# Altium PCB Current-Probe.PcbDoc
Units mm, origin at the board's own origin, x right, y up, seen from the top; angles counter-clockwise.
Board outline 25 x 45 mm, 4 copper layers (Top Layer, MidLayer1, MidLayer2, Bottom Layer), stack 1.57 mm thick; 62 components, 32 nets, 189 pads, 50 vias.
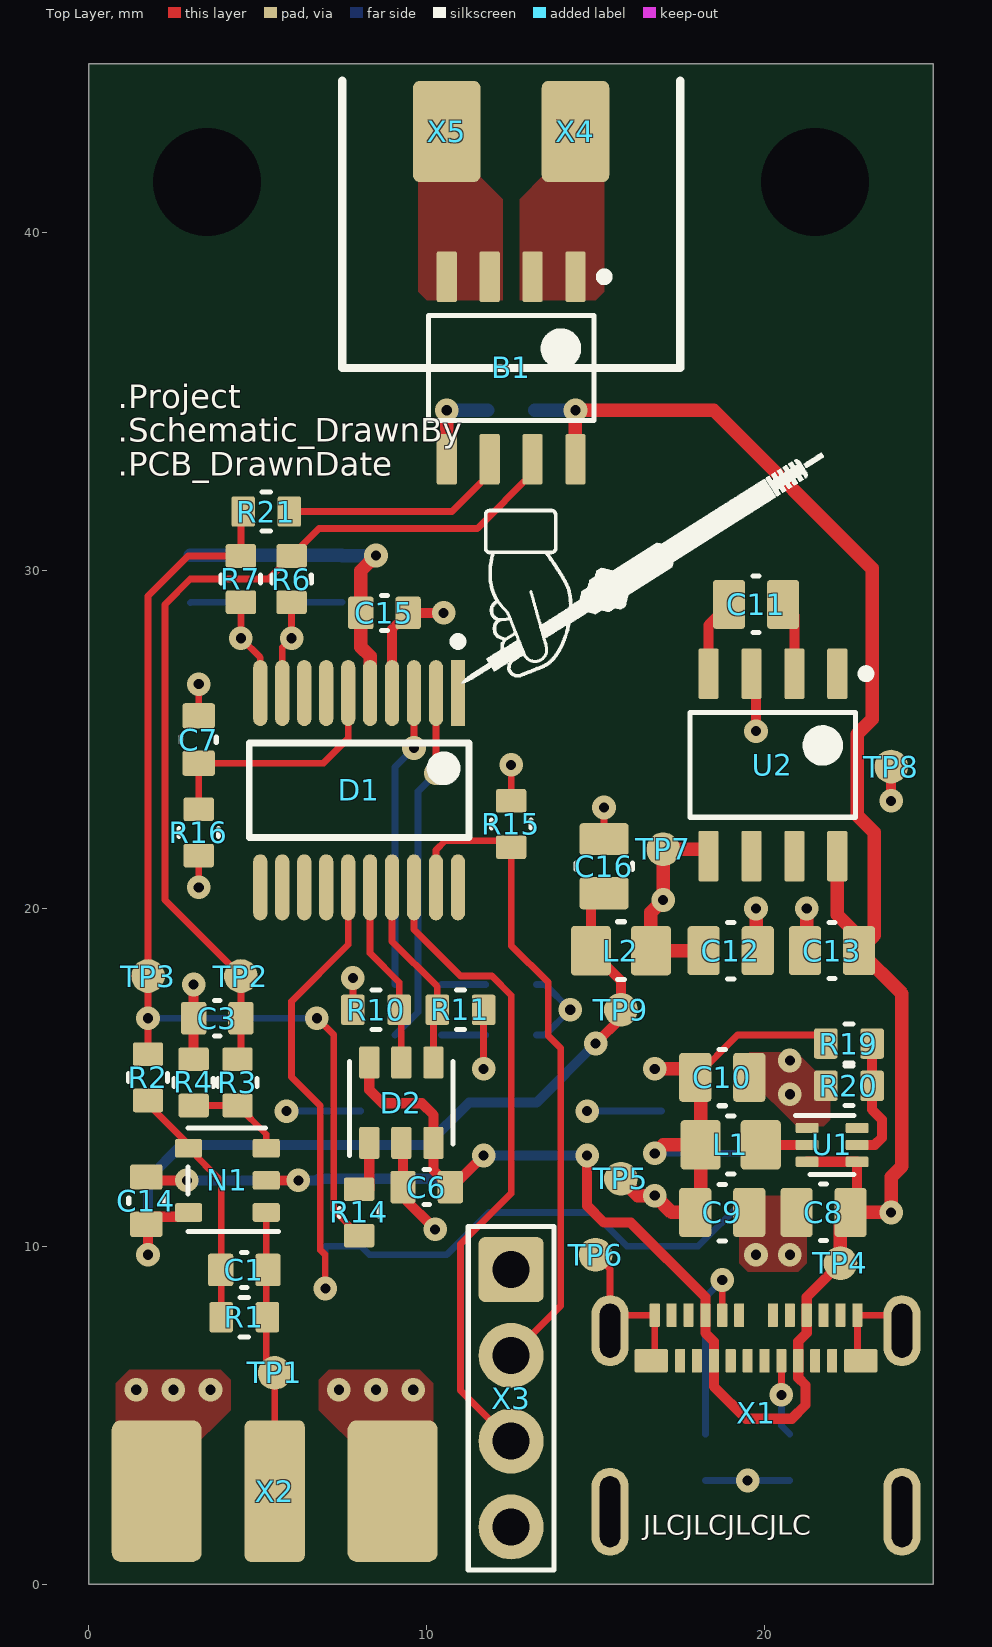
[diagram p0: Top Layer view]
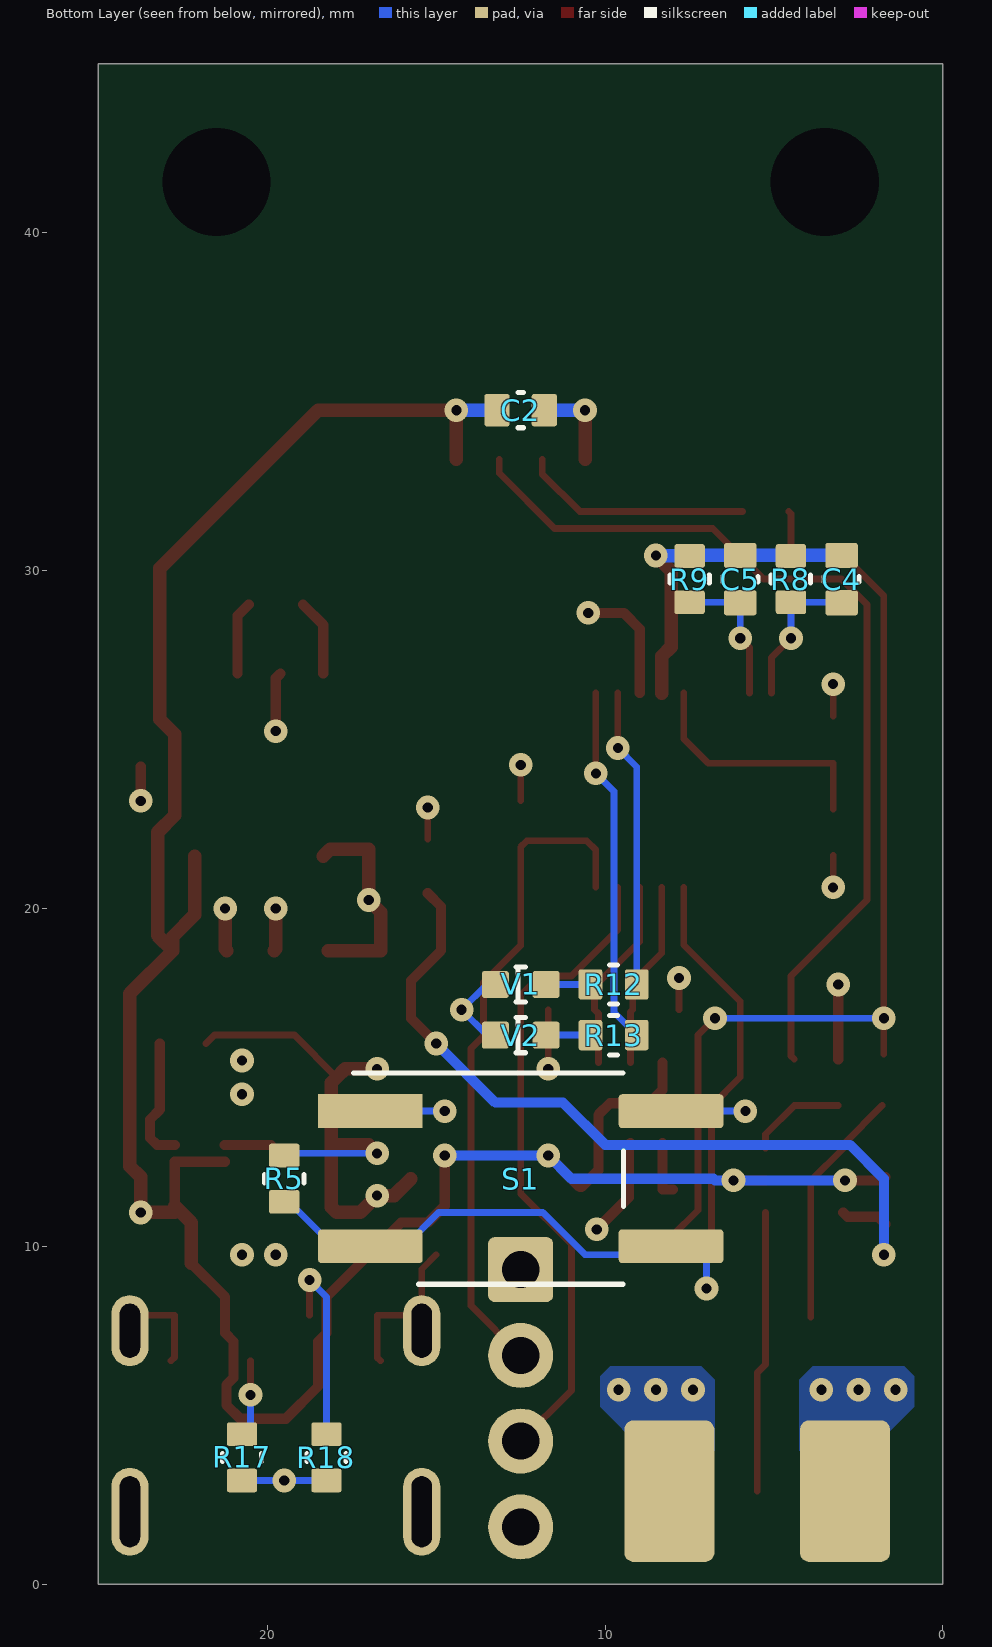
[diagram p1: Bottom Layer view, seen from below]
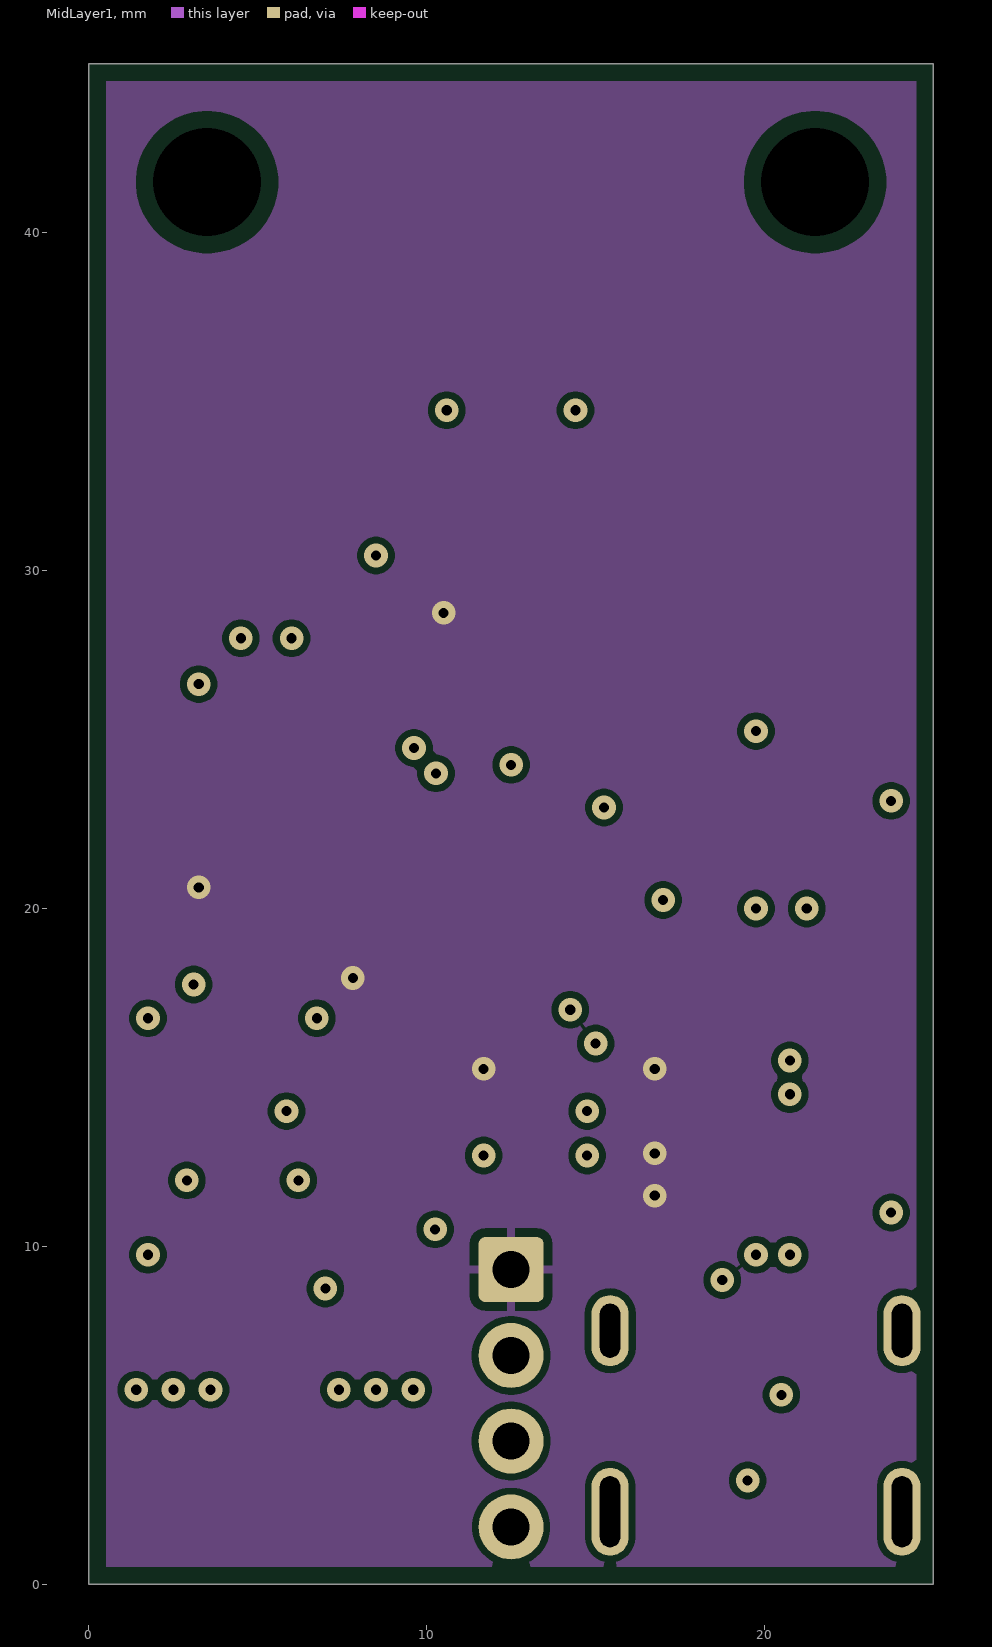
[diagram p2: MidLayer1]
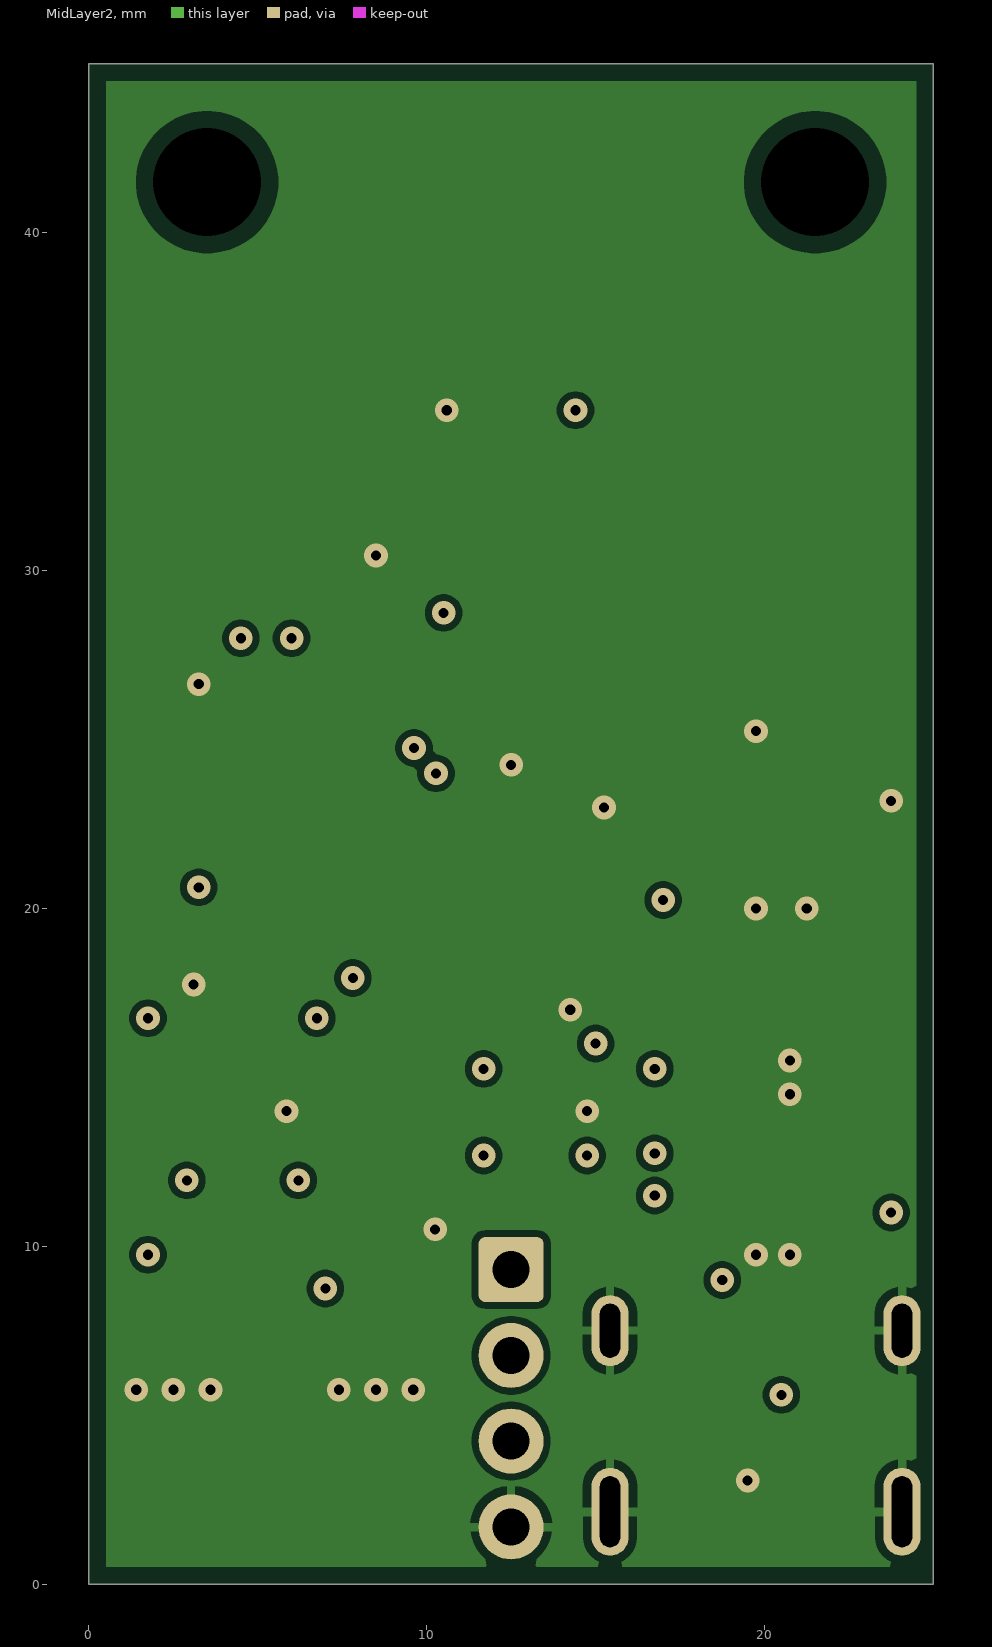
[diagram p3: MidLayer2]
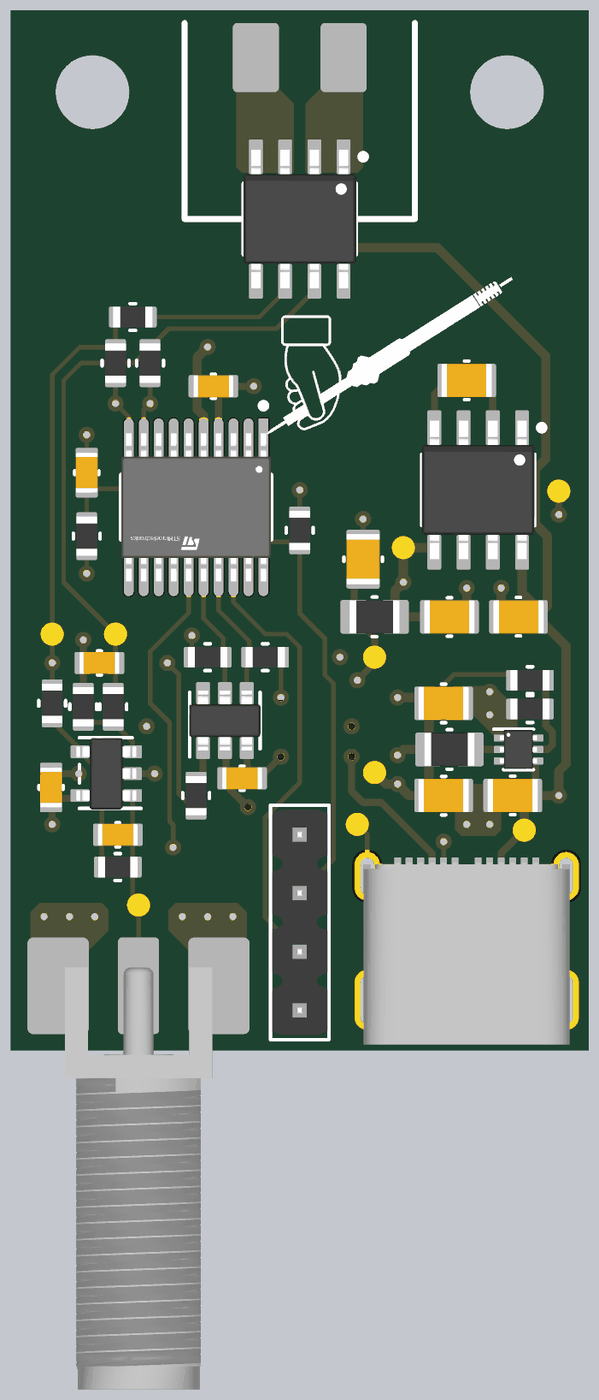
[diagram p4: 3D render of the assembled board from above, using the file's embedded part models]
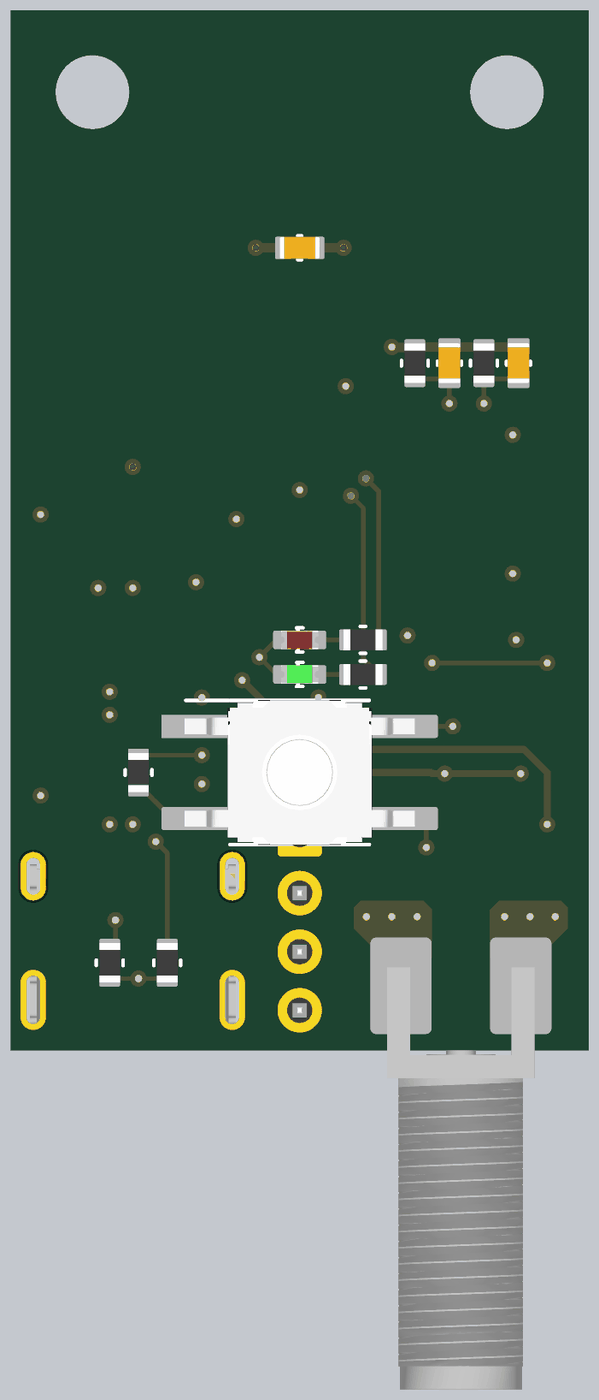
[diagram p5: 3D render of the assembled board from below, using the file's embedded part models]

## Layer stack, top to bottom
Top Solder: solder mask 0.01, Solder Resist, Dk 3.5
Top Layer: signal copper 0.035
Dielectric1: prepreg 0.18, FR-4 (7628), Dk 4.2
Dielectric 2: prepreg 0.18, FR-4 (7628), Dk 4.2
MidLayer1: signal copper 0.035
Core: core 0.71, Dk 4.2
MidLayer2: signal copper 0.035
Dielectric 3: prepreg 0.18, FR-4 (7628), Dk 4.2
Dielectric 4: prepreg 0.18, FR-4 (7628), Dk 4.2
Bottom Layer: signal copper 0.035
Bottom Solder: solder mask 0.01, Solder Resist, Dk 3.5

## Board outline
0,0 0,45 25,45 25,0

## Design rules (kind name [scope] priority, off if disabled: settings)
AssemblyTestPointUsage [IsTestpoint] p1:
AssemblyTestpoint [IsTestpoint] p1 off: testpointundercomponent=TRUE minsize=0.8 maxsize=1.6 preferedsize=0.85 minholesize=0 maxholesize=0 preferedholesize=0 testpointgrid=0.025 usegrid=FALSE gridtolerance=0 allowsidetop=TRUE allowsidebottom=TRUE minspacing=2.54
BoardOutlineClearance [All and not OnLayer('Top Overlay')] p1: gap=0.5 ignorepadtopadclearanceinfootprint=FALSE except(0: Arc-SplitContinuation Track-SplitContinuation SMDPad-SplitContinuation Fill-SplitContinuation Poly-SplitContinuation Region-SplitContinuation Text-SplitContinuation; 1.5: THPad-SplitContinuation Via-SplitContinuation)
Clearance Clearance_NetClasses [InNetClass('PrimarySide') vs InNetClass('SecondarySide')] p1: gap=1 ignorepadtopadclearanceinfootprint=FALSE except(0: Arc-Hole Track-Hole SMDPad-Hole THPad-Hole Via-Hole Fill-Hole Poly-Hole Region-Hole Text-Hole)
Clearance Clearance_Pri-PE [InNetClass('PrimarySide') vs InNet('EARTH') or InNet('EARTH_G2') or InNet('EARTH_USB') or InNet('NetC3_2')] p2: gap=1 ignorepadtopadclearanceinfootprint=FALSE except(0: Arc-Hole Track-Hole SMDPad-Hole THPad-Hole Via-Hole Fill-Hole Poly-Hole Region-Hole Text-Hole)
Clearance Clearance_Sec-PE [InNetClass('SecondarySide') vs InNet('EARTH') or InNet('EARTH_G2') or InNet('EARTH_USB') or InNet('NetC3_2')] p3: gap=0.5 ignorepadtopadclearanceinfootprint=FALSE except(0: Arc-Hole Track-Hole SMDPad-Hole THPad-Hole Via-Hole Fill-Hole Poly-Hole Region-Hole Text-Hole)
Clearance Clearance_KeepOut [OnLayer('Keep-Out Layer')] p4: gap=0.5 ignorepadtopadclearanceinfootprint=FALSE except(0: Arc-Hole Track-Hole SMDPad-Hole THPad-Hole Via-Hole Fill-Hole Poly-Hole Region-Hole Text-Hole)
Clearance Clearance2Holes [not OnTopLayer AND NOT OnBottomLayer vs (ObjectKind = 'Pad') And (Layer = 'MultiLayer') And (PadIsPlated = 'False')] p5: gap=0.5 ignorepadtopadclearanceinfootprint=FALSE except(0: Arc-Hole Track-Hole SMDPad-Hole THPad-Hole Via-Hole Fill-Hole Poly-Hole Region-Hole Text-Hole)
Clearance Clearance_via2via [IsVia vs IsVia] p6: gap=0.15 ignorepadtopadclearanceinfootprint=FALSE
Clearance [All] p7: gap=0.2 ignorepadtopadclearanceinfootprint=FALSE except(0: Arc-Hole Track-Hole SMDPad-Hole THPad-Hole Via-Hole Fill-Hole Poly-Hole Region-Hole Text-Hole)
ComponentClearance [IsComponent] p1 off: gap=0.254 collisioncheckmode=3 verticalgap=0.254 showdistances=TRUE donotcheckwithout3dbody=TRUE
FabricationTestPointUsage [IsTestpoint] p1: valid=0 allowmultiple=FALSE
FabricationTestpoint [IsTestpoint] p1 off: side=3 testpointundercomponent=TRUE minsize=0.8 maxsize=1.6 preferedsize=0.85 minholesize=0 maxholesize=0 preferedholesize=0 testpointgrid=0.025 allowsidetop=TRUE allowsidebottom=TRUE usegrid=FALSE gridtolerance=0 minspacing=2.54 boardedgeclearance=1.9
HoleSize [All] p1: absolutevalues=TRUE maxlimit=6.4 minlimit=0.2 maxpercent=80.000 minpercent=20.000
MinimumAnnularRing MinimumAnnularRingVia [IsVia] p1: minimumring=0.15
MinimumAnnularRing MinimumAnnularRingDefault [All] p2: minimumring=0.15
MinimumSolderMaskSliver MinimumSolderMaskSliver_Symbols [IsComponent] p1: minsoldermaskwidth=0
MinimumSolderMaskSliver [All] p2: minsoldermaskwidth=0.1
PlaneClearance PlaneClearance_PE [InNet('EARTH_USB')  or InNet('EARTH_G2') or InNet('NetC3_2') or InNet('EARTH')] p1: clearance=1
PlaneClearance PlaneClearance_Holes-via [(IsVia)] p2: clearance=0.35
PlaneClearance PlaneClearance_Holes-Special [(InComponentClass('SpecialConnector'))] p3: clearance=0.35
PlaneClearance [All] p4: clearance=0.5
PlaneConnect "PlaneConnect_Special Con" [OnBottomLayer or OnTopLayer] p1: planeconnectstyle=Direct reliefexpansion=0.508 reliefentries=4 reliefconductorwidth=0.254 reliefairgap=0.254
PlaneConnect PlaneConnect_Components [(InComponentClass('All Components'))] p2: planeconnectstyle=Relief reliefexpansion=0.35 reliefentries=4 reliefconductorwidth=0.25 reliefairgap=0.25
PlaneConnect [All] p3: planeconnectstyle=Direct reliefexpansion=0.508 reliefentries=4 reliefconductorwidth=0.254 reliefairgap=0.254
PolygonConnect PolygonConnect_Components [(InComponentClass('All Components') and not OnOutside)] p1: connectstyle=Relief reliefconductorwidth=0.254 reliefentries=4 polygonreliefangle="90 Angle" airgapwidth=0.254
PolygonConnect [All] p2: connectstyle=Direct reliefconductorwidth=0.254 reliefentries=4 polygonreliefangle="90 Angle" airgapwidth=0.254
RoutingVias Micro-Vias [((ObjectKind = 'Via') AND (StartLayer = 'Top Layer') AND (StopLayer = 'InternalPlane1')) OR ((ObjectKind = 'Via') AND (StartLayer = 'Bottom Layer') AND (StopLayer = 'InternalPlane2'))] p1: holewidth=0.15 width=0.35 viastyle="Through Hole" minholewidth=0.15 minwidth=0.35 maxholewidth=0.15 maxwidth=0.35
RoutingVias [All] p2: holewidth=0.2 width=0.55 viastyle="Through Hole" minholewidth=0.2 minwidth=0.55 maxholewidth=0.3 maxwidth=0.7
SilkToSilkClearance [All] p1: silktosilkclearance=0.2
SilkToSolderMaskClearance SilkToPadClearance [IsPad] p1: minsilkscreentomaskgap=0.2 clearancetoexposedcopper=TRUE
SolderMaskExpansion SolderMaskExpansionVias [IsVia] p1: expansion=0.15 istentingtop=FALSE soldermaskfromhole=TRUE
SolderMaskExpansion SolderMaskExpansionHoles [(ObjectKind = 'Pad') And (PadIsPlated = 'False') And (AsMM(PadXSize_AllLayers) = 0) And (AsMM(PadYSize_AllLayers) = 0)] p2: expansion=0.05 istentingtop=FALSE soldermaskfromhole=TRUE
SolderMaskExpansion SolderMaskExpansionSTD [IsPad  Or IsRegion] p3: expansion=0.05 istentingtop=FALSE
ViasUnderSMD ViasUnderSMD_TP [HasFootprint('TP_1.0mm')] p1: allowed=TRUE
ViasUnderSMD [All] p2: allowed=FALSE
Width [All] p1: maxlimit=2 minlimit=0.15 preferedwidth=0.2 minimp=50.000000 maximp=50.000000 favimp=50.000000
19 further rules are at their usual default settings.

## Classes and differential pairs
component class Surface_Assy: L2
component class Testpoint: TP1 TP2 TP3 TP4 TP5 TP6 TP7 TP8 TP9 X4 X5
component class Through-Hole_Assy: X1 X2 X3
component class Surface_Assy: B1 C1 C2 C3 C4 C5 C6 C7 C8 C9 C10 C11 C12 C13 C14 C15 C16 D1 D2 L1 N1 R1 R2 R3 R4 R5 R6 R7 R8 R9 R10 R11 R12 R13 R14 R15 R16 R17 R18 R19 R20 R21 S1 U1 U2 V1 V2

## Components (designator, comment, footprint, x,y, rotation, side; value= is the part's Value field where it differs from the comment)
B1 "CC6920SO-40A" SOIC8_N_RF 12.5,36 r270 top
C1 "Cap 10p 0603" C-0603_1608_095_L_RF 4.6,9.3 r0 top value=10pF
C2 "Cap 100n 0603" C-0603_1608_095_L_RF 12.5,34.75 r0 bottom value=100nF
C3 "Cap 100p 0603" C-0603_1608_095_L_RF 3.8,16.75 r0 top value=100pF
C4 "Cap 100p 0603" C-0603_1608_095_L_RF 3,29.75 r270 bottom value=100pF
C5 "Cap 100p 0603" C-0603_1608_095_L_RF 6,29.75 r270 bottom value=100pF
C6 "Cap 100n 0603" C-0603_1608_095_L_RF 10,11.75 r0 top value=100nF
C7 "Cap 100n 0603" C-0603_1608_095_L_RF 3.25,25 r270 top value=100nF
C8 "Cap 10u 0805" C-0805_2012_155_L_RF 21.75,11 r0 top value=10µF
C9 "Cap 10u 0805" C-0805_2012_155_L_RF 18.75,11 r180 top value=10µF
C10 "Cap 10u 0805" C-0805_2012_155_L_RF 18.75,15 r180 top value=10µF
C11 "Cap 10u 0805" C-0805_2012_155_L_RF 19.75,29 r0 top value=10µF
C12 "Cap 10u 0805" C-0805_2012_155_L_RF 19,18.75 r180 top value=10µF
C13 "Cap 10u 0805" C-0805_2012_155_L_RF 22,18.75 r0 top value=10µF
C14 "Cap 100n 0603" C-0603_1608_095_L_RF 1.7,11.35 r90 top value=100nF
C15 "Cap 100n 0603" C-0603_1608_095_L_RF 8.75,28.75 r0 top value=100nF
C16 "Cap 10u 0805" C-0805_2012_155_L_RF 15.25,21.25 r270 top value=10µF
D1 "STM32G030F6P6" TSSOP20_N_RF 8,23.5 r270 top
D2 "MCP4726A0T" SOT23-6_N_RF 9.25,14.25 r0 top
L1 "1uH" L_0805_N_RF 19,13 r180 top
L2 "600R" L_0805_N_RF 15.75,18.75 r180 top
N1 "LMC7101AIM5X" SOT23-5_L_RF 4.1,11.95 r90 top value=LM78L12ACM
R1 "Res 1k 0603" R-0603_1608_050_L_RF 4.6,7.9 r0 top value=1k
R2 "Res 1k 0603" R-0603_1608_050_L_RF 1.75,15 r270 top value=1k
R3 "Res 1k 0603" R-0603_1608_050_L_RF 4.4,14.85 r270 top value=1k
R4 "Res 1k 0603" R-0603_1608_050_L_RF 3.1,14.85 r90 top value=1k
R5 "Res 1k 0603" R-0603_1608_050_L_RF 19.5,12 r90 bottom value=1k
R6 "Res 10k 0603" R-0603_1608_050_L_RF 6,29.75 r270 top value=10k
R7 "Res 10k 0603" R-0603_1608_050_L_RF 4.5,29.75 r270 top value=10k
R8 "Res 10k 0603" R-0603_1608_050_L_RF 4.5,29.75 r270 bottom value=10k
R9 "Res 10k 0603" R-0603_1608_050_L_RF 7.5,29.75 r270 bottom value=10k
R10 "Res 1k 0603" R-0603_1608_050_L_RF 8.5,17 r180 top value=1k
R11 "Res 1k 0603" R-0603_1608_050_L_RF 11,17 r0 top value=1k
R12 "Res 1k 0603" R-0603_1608_050_L_RF 9.75,17.75 r180 bottom value=1k
R13 "Res 1k 0603" R-0603_1608_050_L_RF 9.75,16.25 r180 bottom value=1k
R14 "Res 1k 0603" R-0603_1608_050_L_RF 8,11 r90 top value=1k
R15 "Res 1k 0603" R-0603_1608_050_L_RF 12.5,22.5 r270 top value=1k
R16 "Res 10k 0603" R-0603_1608_050_L_RF 3.25,22.25 r270 top value=10k
R17 "Res 5k1 0603" R-0603_1608_050_L_RF 20.75,3.75 r90 bottom value=5.1k
R18 "Res 5k1 0603" R-0603_1608_050_L_RF 18.25,3.75 r90 bottom value=5.1k
R19 "Res 68k 0603" R-0603_1608_050_L_RF 22.5,16 r180 top value=68k
R20 "Res 15k 0603" R-0603_1608_050_L_RF 22.5,14.75 r0 top value=15k
R21 "Res 0R 0603" R-0603_1608_050_L_RF 5.25,31.75 r180 top value=0R
S1 "KSC241GLFS" S-0062x0062_R_P0890_C&K-KSC-241G-LFS 12.5,12 r270 bottom
TP1 "TestPoint 1.0mm" TP_1.0mm 5.5,6.25 r90 top value=TP
TP2 "TestPoint 1.0mm" TP_1.0mm 4.5,18 r90 top value=TP
TP3 "TestPoint 1.0mm" TP_1.0mm 1.75,18 r270 top value=TP
TP4 "TestPoint 1.0mm" TP_1.0mm 22.25,9.5 r0 top value=TP
TP5 "TestPoint 1.0mm" TP_1.0mm 15.75,12 r0 top value=TP
TP6 "TestPoint 1.0mm" TP_1.0mm 15,9.75 r0 top value=TP
TP7 "TestPoint 1.0mm" TP_1.0mm 17,21.75 r180 top value=TP
TP8 "TestPoint 1.0mm" TP_1.0mm 23.75,24.2 r180 top value=TP
TP9 "TestPoint 1.0mm" TP_1.0mm 15.75,17 r0 top value=TP
U1 "TPS62A01A" SOT-563_N_RF 22,13 r0 top
U2 "TC7660E" SOIC8_N_RF 20.25,24.25 r270 top
V1 "LED SMD 0603 Red" LED-0603_1608_Red_L_RF 12.5,17.75 r0 bottom value=red
V2 "LED SMD 0603 Green" LED-0603_1608_Green_L_RF 12.5,16.25 r0 bottom value=green
X1 "105450-0101" 105450-0101 19.75,7.5 r0 top
X2 "73251-2120" 73251-2120 5.5,2.75 r180 top
X3 "CONN HEADER 4POS 1ROW THT 2.54MM" X-0101X0025_R_FCI_77311-118-04LF 12.5,5.5 r270 top value=77311-118-04LF
X4 "" Lötpad_2x3 14.405,43 r180 top
X5 "" Lötpad_2x3 10.595,43 r180 top

## Footprints (in the part's own frame and the unit in brackets; to place one, negate y for a bottom-side part, rotate by r counter-clockwise, add the part's x,y. Pads: shape width x height; smd on the part's side, far side on the other; paste and mask are expansions set on the pad)
73251-2120 [mm] "SMA Connector"
  rrect20% 1.78x4.19 smd: 1(0,0)
  rrect20% 2.665x4.19 smd: 2(-3.492,0) 2(3.492,0)
  rrect20% 2.665x4.19 smd far side: 2(-2.6,0) 2(2.6,0)
  body extent -3.2,-0.8 3.2,17.5, height 3.9
105450-0101 [mm] "USB-C Connector"
  rrect20% 0.3x0.7 smd: A1(-3,0.46) A2(-2.5,0.46) A3(-2,0.46) A4(-1.5,0.46) A5(-1,0.46) A6(-0.5,0.46) A7(0.5,0.46) A8(1,0.46) A9(1.5,0.46) A10(2,0.46) A11(2.5,0.46) A12(3,0.46) B2(2.25,-0.89) B3(1.75,-0.89) B4(1.25,-0.89) B5(0.75,-0.89) B6(0.25,-0.89) B7(-0.25,-0.89) B8(-0.75,-0.89) B9(-1.25,-0.89) B10(-1.75,-0.89) B11(-2.25,-0.89)
  rrect20% 1x0.7 smd mask+0.15: B1(3.1,-0.89) B12(-3.1,-0.89)
  oval 1.1x2.6 hole 0.6 slot 2.1 at 90 deg: S(-4.32,-5.36) S(4.32,-5.36)
  oval 1.1x2.1 hole 0.6 slot 1.6 at 90 deg mask+0.102: S(-4.32,0) S(4.32,0)
  body extent -4.47,-7.3 4.47,0.6, height 3.18
C-0603_1608_095_L_RF [mm] "Capacitor Chip 0603 Reflow; IPC7351C; Least; A.0"
  rrect20% 0.75x0.96 smd: 1(-0.7,0) 2(0.7,0)
  silkscreen extent -0.08,-0.52 0.08,0.52, body extent -0.87,-0.48 0.88,0.48, height 0.95
C-0805_2012_155_L_RF [mm] "Capacitor Chip 0805 Reflow; IPC7351C; Least; A.0"
  rrect20% 0.95x1.45 smd: 1(-0.8,0) 2(0.8,0)
  silkscreen extent -0.09,-0.83 0.09,0.84, body extent -1.1,-0.72 1.11,0.73, height 1.55
L_0805_N_RF [mm]
  rrect20% 1.19x1.47 smd: 1(-0.89,0) 2(0.89,0)
  silkscreen extent -0.1,-0.86 0.1,0.86, body extent -1.1,-0.72 1.1,0.73, height 0.9
LED-0603_1608_Green_L_RF [mm] "LED Chip 0603 Reflow_Green, LTST-C190KGKT"
  rrect20% 0.8x0.8 smd: 1(-0.75,0) 2(0.75,0)
  silkscreen extent -0.14,-0.52 0.14,0.52, body extent -0.81,-0.4 0.81,0.4, height 0.75
LED-0603_1608_Red_L_RF [mm] "LED Chip 0603 Reflow_Red,  LTST-C190CKT"
  rrect20% 0.8x0.8 smd: 1(-0.75,0) 2(0.75,0)
  silkscreen extent -0.14,-0.52 0.14,0.52, body extent -0.81,-0.4 0.81,0.4, height 0.75
Lötpad_2x3 [mm]
  rrect20% 2x3 smd: 1(0,0)
R-0603_1608_050_L_RF [mm] "Resistor Chip 0603 Reflow; IPC7351C; Least; A.1"
  rrect20% 0.7x0.9 smd: 1(-0.685,0) 2(0.685,0)
  silkscreen extent -0.12,-0.58 0.12,0.58, body extent -0.85,-0.45 0.85,0.45, height 0.5
S-0062x0062_R_P0890_C&K-KSC-241G-LFS [mm] "Tact Switch-C&K PTS647SK70SMTR2LFS 7mm Pusher"
  rect 1x3.1 smd: 1(-2,-4.45)
  rrect20% 1x3.1 smd: 2(-2,4.45) 3(2,-4.45) 4(2,4.45)
  silkscreen extent -3.13,-4.95 3.12,3.04, body extent -3.15,-5 3.15,5, height 3.5
SOIC8_N_RF [mm] "SOIC, 8-Leads, Body 4.90x3.90mm, Pitch 1.27mm, IPC Medium Density"
  rrect20% 1.5x0.6 smd: 1(-2.7,1.905) 2(-2.7,0.635) 3(-2.7,-0.635) 4(-2.7,-1.905) 5(2.7,-1.905) 6(2.7,-0.635) 7(2.7,0.635) 8(2.7,1.905)
  silkscreen extent -2.82,-2.45 1.55,2.88, body extent -3,-2.45 3,2.45, height 1.75
SOT23-5_L_RF [mm] "SOT23, 5-Leads, Body 2.90x2.70mm, Pitch 0.95mm, IPC High Density_A.1"
  rrect20% 0.55x0.8 smd: 1(-0.95,-1.15) 2(0,-1.15) 3(0.95,-1.15) 4(0.95,1.15) 5(-0.95,1.15)
  silkscreen extent -1.51,-1.51 1.56,1.17, body extent -1.55,-1.3 1.55,1.3, height 1.15
SOT23-6_N_RF [mm] "SOT23, 6-Leads, Body 2.90x2.70mm, Pitch 0.95mm, IPC Medium Density"
  rrect20% 0.6x0.95 smd: 1(-0.95,-1.19) 2(0,-1.19) 3(0.95,-1.19) 4(0.95,1.19) 5(0,1.19) 6(-0.95,1.19)
  silkscreen extent -1.53,-1.57 1.53,1.22, body extent -1.55,-1.3 1.55,1.3, height 1.15
SOT-563_N_RF [mm] "SOTFL, 6-Leads, Body 1.60x1.60mm, Pitch 0.50mm, IPC Medium Density"
  rrect20% 0.67x0.3 smd: 1(-0.74,0.5) 2(-0.74,0) 3(-0.74,-0.5) 4(0.74,-0.5) 5(0.74,0) 6(0.74,0.5)
  silkscreen extent -1.08,-0.88 0.65,0.88, body extent -0.8,-0.85 0.8,0.85, height 0.6
TP_1.0mm [mm] "Testpoint 1.0mm"
  round 1 smd paste-0.5: 1(0,0)
TSSOP20_N_RF [mm]
  rect 1.955x0.421 smd mask+0.05: 1(-2.875,2.925)
  rrect100% 1.955x0.421 smd mask+0.05: 2(-2.875,2.275) 3(-2.875,1.625) 4(-2.875,0.975) 5(-2.875,0.325) 6(-2.875,-0.325) 7(-2.875,-0.975) 8(-2.875,-1.625) 9(-2.875,-2.275) 10(-2.875,-2.925) 11(2.875,-2.925) 12(2.875,-2.275) 13(2.875,-1.625) 14(2.875,-0.975) 15(2.875,-0.325) 16(2.875,0.325) 17(2.875,0.975) 18(2.875,1.625) 19(2.875,2.275) 20(2.875,2.925)
  silkscreen extent -4.53,-3.25 1.4,3.25, body extent -4.35,-3.75 4.35,3.75, height 0.25
X-0101X0025_R_FCI_77311-118-04LF [mm] "Pin Headder; 2.54mm, FCI"
  rrect20% 1.925x1.925 hole 1.1: 1(-3.81,0)
  round 1.925 hole 1.1: 2(-1.27,0) 3(1.27,0) 4(3.81,0)
  silkscreen extent -5.08,-1.27 5.08,1.27, body extent -4.88,-1.2 4.88,1.21, height 8.38

## Part data
B1: "IC Current sensor ±40A 5V", Case/Package=SO8, Manufacturer="Cross chip", ClassName=Surface_Assy, Footprint_validated=No, GPV_Number=xxxx.xxxx, Manufacturer Part Number=CC6920SO-40A, MNL_Number=xxxxxxxx, Part_validated=No, PartStatus=New, System=-, Technology=SMT
C1: library part CMP-001-0041-2, "Cap Cer SMD 10p 50V +/- 0.25pF  0603 C0G", Case / Package=0603, Manufacturer=AVX, Manufacturer Part Number=06035A100CAT*, ClassName=Surface_Assy, ComponentLink1Description=Datasheet, ComponentLink1URL=https://datasheet.ciiva.com/11464/ccog-11464569.pdf, GPV_Number=1749.0090, PartStatus=Release, Prefered=true, Technology=SMT, User=zupa
C2 C6 C7 C14 C15: library part CMP-001-0037-3, "Cap Cer SMD 100n 50V 10% 0603 X7R", Case / Package=0603, Manufacturer=KEMET, Manufacturer Part Number=C0603C104K5RAC, ClassName=Surface_Assy, GPV_Number=1749.0075, MNL_Number=22310507, PartStatus=Release, Prefered=true, Technology=SMT, User=epph
C3 C4 C5: library part CMP-001-0000-2, "Cap Cer SMD 100p 50V 5% 0603 C0G", Case / Package=0603, Manufacturer=YAGEO, Manufacturer Part Number=CC0603J*NPO9BN101, ClassName=Surface_Assy, ComponentLink1Description=Datasheet, ComponentLink1URL=https://datasheet.ciiva.com/11786/0900766b8079c870-11786060.pdf, GPV_Number=1749.0055, PartStatus=Release, Prefered=false, Technology=SMT, User=zupa
C8 C9 C10 C11 C12 C13 C16: library part CMP-00147-1, "Cap Cer SMD 10u 16V 10% 0805 X7R", Case / Package=0805, Manufacturer=Yageo, Manufacturer 2=SAMSUNG, Manufacturer Part Number=CC0805KKX7R7BB106, Manufacturer Part Number 2=CL21B106KOQNNN, ClassName=Surface_Assy, GPV_Number=1750.0364, PartStatus=Release, Prefered=true, Technology=SMT, User=epph
D1: "IC MCU Cortex M0+ 32K Flash, 8K RAM, 64MHz", Case/Package=TSSOP20, Manufacturer=ST, Supplier Part Number 1=STM32G030F6P6TR, ClassName=Surface_Assy, Footprint_validated=No, GPV_Number=xxxx.xxxx, Manufacturer Part Number=STM32G030F6P6, MNL_Number=xxxxxxxx, Part_validated=No, PartStatus=New, Supplier 1="Arrow Electronics", System=-, Technology=SMT
D2: "IC DAC I2C 12Bit 2.7V-5.5V", Case/Package=SOT-23-6, Manufacturer=Microchip, ClassName=Surface_Assy, Footprint_validated=No, GPV_Number=xxxx.xxxx, Manufacturer Part Number=MCP4726A0T, MNL_Number=xxxxxxxx, Part_validated=No, PartStatus=New, System=-, Technology=SMT
L1: library part MPH201210S1R0, "Inductor 1uH 0.95A", Case/Package=0805, Manufacturer=Sunlord, ClassName=Surface_Assy, Footprint_validated=No, GPV_Number=xxxx.xxxx, Manufacturer Part Number=MPH201210S1R0, MNL_Number=xxxxxxxx, Part_validated=No, PartStatus=New, System=-, Technology=SMT
L2: library part 782853611, "Ferrite Bead 600Ohm 2A 0805", Case/Package="0201 | 0402 | 0603 | 0805 | 1206 | SO8 | SO16 |", Manufacturer=Würth, ClassName="Surface_Assy | Testpoint | Through-Hole_Assy | NetTie | Symbol | Mechanical", Footprint_validated="Yes | No", GPV_Number=xxxx.xxxx, Manufacturer Part Number=782853611, MNL_Number=xxxxxxxx, Part_validated="Yes | No", PartStatus="New | Draft | Release", System=Connector, Technology="SMT | THT | SMT-BTC"
N1: library part CMP-001-1191-2, "Low Power OP Rail to Rail", Case / Package=SOT23-5, Manufacturer="Texas Instrument", ClassName=Surface_Assy, GPV_Number=1500.1871, Manufacturer Part Number=LMC7101AIM5X, PartStatus=Release, Technology=SMT, User=zupa
R1 R2 R3 R4 R5 R10 R11 R12 R13 R14 R15: library part CMP-001-0250-3, "Res SMD 1k 1% 0.1W 0603", Case / Package=0603, Manufacturer=YAGEO, Manufacturer Part Number=RC0603FR-071KL, ClassName=Surface_Assy, ComponentLink1Description=Datasheet, ComponentLink1URL=https://datasheet.ciiva.com/11808/0900766b80f96399-11808280.pdf, GPV_Number=1922.0011, MNL_Number=15310012, PartStatus=Release, Prefered=true, Technology=SMT, User=zupa
R6 R7 R8 R9 R16: library part CMP-001-0241-3, "Res SMD 10k 1% 0.1W 0603", Case / Package=0603, Manufacturer=YAGEO, Manufacturer Part Number=RC0603FR-0710KL, ClassName=Surface_Assy, ComponentLink1Description=Datasheet, ComponentLink1URL=https://datasheet.ciiva.com/11808/0900766b80f96399-11808280.pdf, GPV_Number=1922.0100, MNL_Number=15310022, PartStatus=Release, Prefered=true, Technology=SMT, User=zupa
R17 R18: library part CMP-001-0582-3, "Res SMD 5k1 1% 0.1W 0603", Case / Package=0603, Manufacturer=YAGEO, Manufacturer Part Number=RC0603FR-075K1L, ClassName=Surface_Assy, ComponentLink1Description=Datasheet, ComponentLink1URL=https://datasheet.ciiva.com/8895/pyu-rc0603-51-rohs-l-4-8895189.pdf, GPV_Number=1922.0144, PartStatus=Release, Prefered=true, Technology=SMT, User=napa
R19: library part CMP-001-0280-3, "Res SMD 68k 1% 0.1W 0603", Case / Package=0603, Manufacturer=YAGEO, Manufacturer Part Number=RC0603FR-0768KL, ClassName=Surface_Assy, ComponentLink1Description=Datasheet, ComponentLink1URL=https://datasheet.ciiva.com/11808/0900766b80f96399-11808280.pdf, GPV_Number=1922.1473, PartStatus=Release, Prefered=true, Technology=SMT, User=zupa
R20: library part CMP-001-0247-3, "Res SMD 15k 1% 0.1W 0603", Case / Package=0603, Manufacturer=YAGEO, Manufacturer Part Number=RC0603FR-0715KL, ClassName=Surface_Assy, ComponentLink1Description=Datasheet, ComponentLink1URL=https://datasheet.ciiva.com/11808/0900766b80f96399-11808280.pdf, GPV_Number=1922.0034, PartStatus=Release, Prefered=true, Technology=SMT, User=zupa
R21: library part CMP-001-0239-3, "Res SMD 0R 0.1W 0603", Manufacturer=KOA, Manufacturer Part Number=RK73Z1JT**, ClassName=Surface_Assy, ComponentLink1Description=Datasheet, ComponentLink1URL=https://datasheet.ciiva.com/26914/getdatasheetpartid-123499-26914653.pdf, GPV_Number=1922.1618, MNL_Number=15500007, PartStatus=Release, Prefered=false, Technology=SMT, User=zupa
S1: library part CMP-00014-2, "Switch Tactile N.O. SPST Round Button Gull Wing 0.05A 32VDC 1VA 300000Cycle 4N SMD T/R", Manufacturer="ITT C&K", ClassName=Surface_Assy, ComponentLink1Description=https://datasheet.ciiva.com/22637/1707722-22637312.pdf?src-supplier=Element14, ComponentLink1URL=https://datasheet.ciiva.com/22637/1707722-22637312.pdf?src-supplier=Element14, ComponentLink2Description=https://datasheet.ciiva.com/26827/ksc-22jan15-26827234.pdf?src-supplier=Verical, ComponentLink2URL=https://datasheet.ciiva.com/26827/ksc-22jan15-26827234.pdf?src-supplier=Verical, ComponentLink3Description=https://datasheet.ciiva.com/2900/ksc-2900211.pdf?src-supplier=Digi-Key, ComponentLink3URL=https://datasheet.ciiva.com/2900/ksc-2900211.pdf?src-supplier=Digi-Key, ComponentLink4Description=https://datasheet.ciiva.com/2900/ksc-2900212.pdf?src-supplier=Digi-Key, ComponentLink4URL=https://datasheet.ciiva.com/2900/ksc-2900212.pdf?src-supplier=Digi-Key, ComponentLink5Description=https://datasheet.ciiva.com/7987/320569-7987015.pdf?src-supplier=Element14, ComponentLink5URL=https://datasheet.ciiva.com/7987/320569-7987015.pdf?src-supplier=Element14, ComponentLink6Description=https://datasheet.ciiva.com/16369/ksc241glfs-16369405.pdf?src-supplier=Future+Electronics, ComponentLink6URL=https://datasheet.ciiva.com/16369/ksc241glfs-16369405.pdf?src-supplier=Future+Electronics, ComponentLink7Description=https://datasheet.ciiva.com/2900/ksc-2900210.pdf?src-supplier=Digi-Key, ComponentLink7URL=https://datasheet.ciiva.com/2900/ksc-2900210.pdf?src-supplier=Digi-Key, Design Item ID=KSC241GLFS, Footprint_validated=False, GPV_Number=2820.0686, Manufacturer Part Number=KSC241GLFS, MNL_Number=xxxxxxxx, Part_validated=False, PartStatus=New, Source=Tischstation_BWE_Part_Prj.SchLib, System=Connector
TP1 TP2 TP3 TP4 TP5 TP6 TP7 TP8 TP9: library part CMP-001-1516-3, ClassName=Testpoint, GPV_Number=-, PartStatus=Release, Technology=SMT, User=zupa
U1: "IC BUCK 1A 2.5-5.5Vin 2.4MHz", Case/Package=SOT563, Manufacturer=TI, Manufacturer Part Number=TPS62A01ADRLR, Supplier Part Number 1=595-TPS62A01ADRLR, ClassName=Surface_Assy, CPN=10018707-E, LPN=1291853, Supplier 1=Mouser, System=-, Technology=SMT
U2: "IC REG Charge Pump negative", Case/Package=SO8, Manufacturer=Microchip, Supplier Part Number 1=TC7660EOA, ClassName=Surface_Assy, Footprint_validated=No, GPV_Number=xxxx.xxxx, Manufacturer Part Number=TC7660E, MNL_Number=xxxxxxxx, Part_validated=No, PartStatus=New, Supplier 1=Onlinecomponents.com, System=-, Technology=SMT
V1: library part CMP-00078-2, "LED Red LTST-C190KRKT 0603", Case / Package=0603, Manufacturer="Lite-On Inc", Manufacturer Part Number=LTST-C190KRKT, ClassName=Surface_Assy, GPV_Number=1602.0646, PartStatus=Release, Technology=SMT, User=epph
V2: library part CMP-001-1208-7, "LED Green LTST-C190KGKT 0603", Case / Package=0603, Manufacturer="Lite-On Inc", Manufacturer Part Number=LTST-C190KGKT, ClassName=Surface_Assy, GPV_Number=1602.0827, PartStatus=Release, Technology=SMT, User=epph
X1: "CONN USB-C 16pin", Case/Package=USB-C, Manufacturer=Molex, ClassName=Through-Hole_Assy, Footprint_validated=No, GPV_Number=xxxx.xxxx, Manufacturer Part Number=105450-0101, MNL_Number=xxxxxxxx, Part_validated=No, PartStatus=New, System=Connector, Technology=SMT
X2: "CONN RF SMA", Case/Package=SMA, Manufacturer=MOLEX, ClassName=Through-Hole_Assy, Footprint_validated=No, GPV_Number=xxxx.xxxx, Manufacturer Part Number=73251-2120, MNL_Number=xxxxxxxx, Part_validated=No, PartStatus=New, System=Connector, Technology=THT
X3: library part CMP-001-1284-4, "CONN HEADER 4POS 1ROW THT 2.54MM FCI 77311-118-04LF", Manufacturer=FCI, Manufacturer Part Number=77311-118-04LF, ClassName=Through-Hole_Assy, ComponentLink1Description=Datasheet, ComponentLink1URL=http://portal.fciconnect.com/Comergent//fci/drawing/77311.pdf, GPV_Number=4401.2630, PartStatus=Release, System=Connector, Technology=THT, User=zupa
X4 X5: library part Lötpad_2mmx3mm, "Solderpad 2mm x 3mm", Case/Package=-, ClassName=Testpoint, Footprint_validated=No, GPV_Number=xxxx.xxxx, Manufacturer=-, Manufacturer Part Number=-, MNL_Number=xxxxxxxx, Part_validated=No, PartStatus=New, System=Connector, Technology=SMT

## Free pads (board coordinates)
  round 0 hole 3.2 unplated: 0(3.5,41.5) 0(21.5,41.5)

## Via types
v1: diameter 0.7, hole 0.3, Top Layer to Bottom Layer, tented both sides, 50 vias

## Nets (pads, with @x,y where several pads share a name; then routed paths per layer and width w, separated by ;. In a path a pad name is that pad's centre, name@x,y a point inside that pad or via, vN(x,y) a via of type N, cw(c..) or ccw(c..) an arc to the next point about the centre after c; other vN are vias at no path point)
+3V3: C9.2 C10.2 C15.2 D1.4 L1.2 R5.2 R10.2 R11.2 R16.2 R19.2 TP5.1 X3.1 | length 24
  Top Layer w0.2: v1(3.25,20.625) R16.2 ; R10.2 v1(7.815,17.94) ; v1(11.685,15.25) R11.2 ; C10.2 19.2,16.25 21.565,16.25 R19.2
  Top Layer w0.3: D1.4 8.975,28.275 C15.2 v1(10.5,28.75)
  Top Layer w0.4: TP5.1 16.25,11.5 v1(16.75,11.5) 17.25,11 C9.2 18.11,11.16 L1.2 ; v1(16.75,12.75) 17,13 L1.2 ; v1(16.75,15.25) 17.7,15.25 C10.2 18.11,14.84 L1.2
  Bottom Layer w0.2: v1(16.75,12.75) 19.435,12.75 R5.2
+5V: B1.8 C2.2 C6.2 C8.2 C13.2 C14.2 D2.3 D2.6 N1.2 TP4.1 U1.3 U1.4 U2.8 X1.A4 X1.A9 X1.B4 X1.B9 | length 80.5
  Top Layer w0.3: C14.2 1.8,11.95 v1(2.9,11.95) ; N1.2 v1(6.2,11.95) ; D2.6 8.3,14.633 8.701,14.232 9.857,14.232 10.2,13.889 D2.3 10.2,12.25 C6.2 10.75,11.75 v1(11.685,12.685) ; v1(14.75,12.685) 14.75,11.2 15.25,10.7 16.045,10.7 18.25,8.495 X1.A4 18.25,7.429 18.5,7.179 X1.B9 18.5,5.85 19.456,4.894 20.807,4.894 21.214,5.301 21.214,5.893 21,6.107 X1.B4 21,7.179 21.25,7.429 X1.A9 21.25,8.5 TP4.1 ; U1.3 U1.4 C8.2@22.74,11.19
  Top Layer w0.4: B1.8 v1(14.405,34.75) 18.5,34.75 23.185,30.065 23.185,25.6 22.74,25.155 22.74,22.76 23.25,22.25 23.25,19.2 C13.2 ; U2.8 22.155,19.811 22.8,19.166 C13.2 ; TP4.1 22.25,10.7 C8.2 C8.2@22.74,11.19 ; C8.2@22.74,11 v1(23.75,11) 23.75,12.05 24.07,12.37 24.07,17.48 C13.2
  Bottom Layer w0.3: v1(2.9,11.95) v1(6.2,11.95) 6.743,11.95 6.793,12 11,12 v1(11.685,12.685) v1(14.75,12.685)
  Bottom Layer w0.4: C2.2 v1(14.405,34.75)
-5V: C14.1 C16.2 L2.2 N1.5 TP9.1 | length 24.8
  Top Layer w0.3: v1(1.75,9.75) 1.75,10.6 C14.1 1.925,10.875 2.825,10.875 N1.5 ; v1(15,16) 15.75,16.75 TP9.1 15.75,17.86 L2.2 14.86,20.06 C16.2
  Bottom Layer w0.3: v1(1.75,9.75) 1.75,12 2.75,13 10,13 11.25,14.25 13.25,14.25 v1(15,16)
ADC_OUT: C5.2 D1.9 R6.2 R9.2 | length 5.4
  Top Layer w0.2: D1.9 5.725,27.725 v1(6,28) R6.2
  Bottom Layer w0.2: v1(6,28) C5.2 6.015,29.065 R9.2
ADC_REF: C4.2 D1.10 R7.2 R8.2 | length 5.5
  Top Layer w0.2: R7.2 v1(4.5,28) 5.075,27.425 D1.10
  Bottom Layer w0.2: C4.2 3.015,29.065 R8.2 v1(4.5,28)
BUTTON: D1.15 R5.1 S1.3 S1.4 | length 28.3
  Top Layer w0.2: v1(7,8.75) 7,9.743 6.851,9.891 6.851,10.898 6.85,10.899 6.85,14.158 6,15.008 6,17.25 7.675,18.925 D1.15
  Bottom Layer w0.2: v1(7,8.75) 7,10 S1.4 8.3,9.75 10.595,9.75 11.845,11 14.93,11 15.93,10 S1.3 18.037,10 19.352,11.315 R5.1
DAC_OUT: D2.1 R14.2 | length 1.7
  Top Layer w0.3: R14.2 8.3,11.685 D2.1
GND: B1.5 C2.1 C3.1 C4.1 C5.1 C6.1 C7.1 C8.1 C9.1 C10.1 C12.1 C13.1 C15.1 C16.1 D1.5 D2.2 R4.2 R8.1 R9.1 R15.1 R17.1 R18.1 R20.1 S1.1 S1.2 TP6.1 TP8.1 U1.1 U2.3 V1.2 V2.2 X1.A1 X1.A12 X1.B1 X1.B12 X1.S X2.2 X3.4 | length 43.7
  Top Layer w0.2: C7.1 v1(3.25,26.64) ; R15.1 v1(12.5,24.25) ; TP6.1 15.43,9.32 15.43,7.5 15.89,7.96 X1.A1 16.75,6.71 X1.B12 ; C16.1 v1(15.25,22.99) ; X1.B1 22.75,6.71 X1.A12 23.61,7.96 X1.S@24.07,7.5
  Top Layer w0.3: R4.2 v1(3.1,17.75) ; D2.2 9.3,13.01 C6.1 9.3,11.45 v1(10.25,10.5) ; U2.3 19.75,26.815 v1(19.75,25.25) ; v1(23.75,23.185) TP8.1
  Top Layer w0.4: D1.5 8.325,27.465 8.05,27.74 C15.1 8.05,30 v1(8.5,30.45) ; B1.5 v1(10.595,34.75) ; v1(19.75,20) 19.75,18.8 C12.1 ; C13.1 21.25,18.8 v1(21.25,20)
  Bottom Layer w0.2: v1(5.85,14) S1.2 ; V2.2 13.5,16.25 v1(14.25,17) 13.5,17.75 V1.2 ; v1(14.75,14) S1.1 ; R18.1 v1(19.5,3.065) R17.1
  Bottom Layer w0.4: C4.1 R8.1@4.485,30.45 ; R8.1@4.515,30.45 C5.1 R9.1@7.485,30.45 ; R9.1 v1@8.485,30.435 ; v1(10.595,34.75) C2.1
  other v1: 1.4,5.75 2.5,5.75 3.6,5.75 7.4,5.75 8.5,5.75 9.6,5.75 19.75,9.75 20.75,9.75 20.75,14.5 20.75,15.5
LED1: D1.2 R13.2 | length 10.6
  Top Layer w0.2: v1(10.275,24) D1.2
  Bottom Layer w0.2: R13.2 9.742,16.927 9.742,23.467 v1(10.275,24)
LED2: D1.3 R12.2 | length 8.9
  Top Layer w0.2: v1(9.625,24.75) D1.3
  Bottom Layer w0.2: R12.2 9.065,24.19 v1(9.625,24.75)
NetB1_1: B1.1 B1.2 X4.1
NetB1_3: B1.3 B1.4 X5.1
NetB1_6: B1.6 R21.1 | length 6.8
  Top Layer w0.2: R21.1 10.75,31.75 11.865,32.865 B1.6
NetC1_1: C1.1 N1.4 R1.1 R2.2 | length 7.1
  Top Layer w0.2: R2.2@1.8,14.165 2.95,13.015 N1.4 3.915,11.935 3.915,9.3 R1.1
NetC7_2: C7.2 D1.6 R16.1 | length 7.4
  Top Layer w0.2: R16.1 C7.2 6.95,24.3 7.675,25.025 D1.6
NetC11_1: C11.1 U2.4 | length 2.3
  Top Layer w0.3: U2.4 18.345,28.395 C11.1
NetC11_2: C11.2 U2.2 | length 2.2
  Top Layer w0.3: C11.2 20.885,28.665 U2.2
NetC12_2: C12.2 L2.1 TP7.1 U2.5 | length 6.1
  Top Layer w0.4: C12.2 L2.1 16.64,19.89 v1(17,20.25) TP7.1 18.145,21.75 U2.5
NetL1_1: L1.1 U1.2 | length 1.4
  Top Layer w0.3: L1.1 U1.2
NetN1_3: N1.3 R3.2 R4.1 | length 2.9
  Top Layer w0.2: R4.1 R3.2 5.25,13.315 N1.3
NetR12_1: R12.1 V1.1 | length 1.3
  Bottom Layer w0.2: R12.1 V1.1
NetR13_1: R13.1 V2.1 | length 1.3
  Bottom Layer w0.2: R13.1 V2.1
NetR17_2: R17.2 X1.B5 | length 2.3
  Top Layer w0.2: v1(20.5,5.6) X1.B5
  Bottom Layer w0.2: v1(20.5,5.6) 20.5,4.685 R17.2
NetR18_2: R18.2 X1.A5 | length 5.8
  Top Layer w0.2: X1.A5 v1(18.75,9)
  Bottom Layer w0.2: R18.2 18.25,8.5 v1(18.75,9)
NetR19_1: R19.1 R20.2 U1.5 | length 3.7
  Top Layer w0.3: U1.5 23.269,13 23.474,13.205 23.474,13.755 23.185,14.044 R20.2 R19.1
OUTPUT: C1.2 N1.1 R1.2 TP1.1 X2.1 | length 8.4
  Top Layer w0.2: N1.1 5.25,6.5 TP1.1 X2.1
SDA2_SCL: D1.16 D2.5 R10.1 | length 5.6
  Top Layer w0.2: D1.16 8.325,18.675 9.185,17.815 R10.1 9.25,16.935 D2.5
SDA2_SDA: D1.17 D2.4 R11.1 | length 5.8
  Top Layer w0.2: D1.17 8.975,19.025 10.315,17.685 R11.1 10.2,16.885 D2.4
SENS_OUT: B1.7 C3.2 R3.1 R6.1 TP2.1 | length 27.3
  Top Layer w0.2: R3.1 4.5,15.635 C3.2 TP2.1 2.25,20.25 2.25,29 3,29.75 5.315,29.75 R6.1 6.815,31.25 11.5,31.25 13.135,32.885 B1.7
SENS_VREF: R2.1 R7.1 R14.1 R21.2 TP3.1 | length 30.1
  Top Layer w0.2: R2.1 v1(1.75,16.75) TP3.1 1.75,29.25 2.935,30.435 R7.1 4.5,31.685 R21.2 ; v1(6.75,16.75) 7.25,16.25 7.25,11.065 R14.1
  Bottom Layer w0.2: v1(1.75,16.75) v1(6.75,16.75)
SWCLK: D1.19 R15.2 X3.2 | length 19.8
  Top Layer w0.2: D1.19 10.275,21.73 10.55,22.005 12.31,22.005 R15.2 12.5,18.906 13.6,17.806 13.6,16.223 13.971,15.852 13.971,8.241 X3.2
SWDIO: D1.18 X3.3 | length 19.4
  Top Layer w0.2: D1.18 9.625,19.375 11,18 11.93,18 12.5,17.43 12.5,11.564 11,10.064 11,5.73 X3.3
pads on no net: D1.1 D1.7 D1.8 D1.11 D1.12 D1.13 D1.14 D1.20 U1.6 U2.1 U2.6 U2.7 X1.A2 X1.A3 X1.A6 X1.A7 X1.A8 X1.A10 X1.A11 X1.B2 X1.B3 X1.B6 X1.B7 X1.B8 X1.B10 X1.B11

## Polygon pours and split planes (outlines as drawn)
GND on Bottom Layer "GND_L04_P004" (solid, pour order 4): 6.75,3.95 6.75,6.05 7.15,6.45 9.85,6.45 10.15,6.15 10.15,5.25 8.85,3.95
GND on Bottom Layer "GND_L04_P003" (solid, pour order 3): 4.25,3.95 4.25,6.05 3.85,6.45 1.15,6.45 0.85,6.15 0.85,5.25 2.15,3.95
NetB1_1 on Top Layer "NETB1_1_L01_P011" (solid, pour order 11): 12.75,38 15,38 15.25,38.25 15.25,41.75 13.5,41.75 12.75,41
NetB1_3 on Top Layer "NETB1_3_L01_P010" (solid, pour order 10): 12.25,38 10,38 9.75,38.25 9.75,41.75 11.5,41.75 12.25,41
GND on Top Layer "GND_L01_P009" (solid, pour order 9): 21.25,9.5 21,9.25 19.5,9.25 19.25,9.5 19.25,11.5 21.25,11.5
GND on Top Layer "GND_L01_P008" (solid, pour order 8): 19.55,15.75 20.95,15.75 21.95,14.75 21.95,13.75 21.75,13.55 20.95,13.55 19.55,14.95
GND on Top Layer "GND_L01_P007" (solid, pour order 7): 10.2,3.85 10.2,5.95 9.8,6.35 7.1,6.35 6.8,6.05 6.8,5.15 8.1,3.85
GND on Top Layer "GND_L01_P006" (solid, pour order 6): 0.8,3.85 0.8,5.95 1.2,6.35 3.9,6.35 4.2,6.05 4.2,5.15 2.9,3.85
GND on MidLayer2 "GND_L03_P000" (solid, pour order 0): 25,45 25,0 0,0 0,45
+3V3 on MidLayer1 "+3V3_L02_P002" (solid, pour order 2): 25,45 25,0 0,0 0,45

## Silkscreen, mask and mechanical layers (free items; w line width, h text height)
Top Overlay:
  drawing of 7 lines, arcs and shapes, not listed
  text ".Project" at 0.85,34.567 h1.2
  text ".Schematic_DrawnBy" at 0.85,33.573 h1.2
  text ".PCB_DrawnDate" at 0.85,32.572 h1.2
  text "JLCJLCJLCJLC" at 16.404,1.261 h1
Board:
  the board outline again, w0.1
Drill Drawing:
  drawing of 337 lines, arcs and shapes, not listed
  text "Layer" at -90.191,78.893 h1.48
  text "Name" at -83.986,78.893 h1.48
  text "Material" at -71.992,78.893 h1.48
  text "Thickness" at -61.211,78.893 h1.48
  text "Constant" at -52.356,78.893 h1.48
  text "Gerber" at -44.157,78.893 h1.48
  text "Board Layer Stack" at -37.115,78.893 h1.48
  text "Top Overlay" at -83.986,75.925 h1.48
  text "GTO" at -44.157,75.925 h1.48
  text "Top Solder" at -83.986,72.957 h1.48
  text "Solder Resist" at -71.992,72.957 h1.48
  text "0.010mm" at -61.211,72.957 h1.48
  text "3.5" at -52.356,72.957 h1.48
  text "GTS" at -44.157,72.957 h1.48
  text "1" at -90.191,69.989 h1.48
  text "Top Layer" at -83.986,69.989 h1.48
  text "0.035mm" at -61.211,69.989 h1.48
  text "GTL" at -44.157,69.989 h1.48
  text "Dielectric1" at -83.986,67.021 h1.48
  text "FR-4 (7628)" at -71.992,67.021 h1.48
  text "0.180mm" at -61.211,67.021 h1.48
  text "4.2" at -52.356,67.021 h1.48
  text "Dielectric 2" at -83.986,64.052 h1.48
  text "FR-4 (7628)" at -71.992,64.052 h1.48
  text "0.180mm" at -61.211,64.052 h1.48
  text "4.2" at -52.356,64.052 h1.48
  text "2" at -90.192,61.084 h1.48
  text "MidLayer1" at -83.986,61.084 h1.48
  text "0.035mm" at -61.211,61.084 h1.48
  text "G1" at -44.157,61.084 h1.48
  text "Core" at -83.986,58.116 h1.48
  text "0.710mm" at -61.211,58.116 h1.48
  text "4.2" at -52.356,58.116 h1.48
  text "3" at -90.191,55.148 h1.48
  text "MidLayer2" at -83.986,55.148 h1.48
  text "0.035mm" at -61.211,55.148 h1.48
  text "G2" at -44.157,55.148 h1.48
  text "Dielectric 3" at -83.986,52.18 h1.48
  text "FR-4 (7628)" at -71.992,52.18 h1.48
  text "0.180mm" at -61.211,52.18 h1.48
  text "4.2" at -52.356,52.18 h1.48
  text "Dielectric 4" at -83.986,49.212 h1.48
  text "FR-4 (7628)" at -71.992,49.212 h1.48
  text "0.180mm" at -61.211,49.212 h1.48
  text "4.2" at -52.356,49.212 h1.48
  text "4" at -90.191,46.244 h1.48
  text "Bottom Layer" at -83.986,46.244 h1.48
  text "0.035mm" at -61.211,46.244 h1.48
  text "GBL" at -44.157,46.244 h1.48
  text "Bottom Solder" at -83.986,43.276 h1.48
  text "Solder Resist" at -71.992,43.276 h1.48
  text "0.010mm" at -61.211,43.276 h1.48
  text "3.5" at -52.356,43.276 h1.48
  text "GBS" at -44.157,43.276 h1.48
  text "Bottom Overlay" at -83.986,40.308 h1.48
  text "GBO" at -44.157,40.308 h1.48
  text "Total board thickness:" at -90.191,37.34 h1.48
  text "1.590mm" at -61.211,37.34 h1.48
  text "Symbol" at -72.398,-44.549 h1.83
  text "Count" at -64.774,-44.549 h1.83
  text "Hole Size" at -57.895,-44.549 h1.83
  text "Hole Length" at -42.896,-44.549 h1.83
  text "Plated" at -28.635,-44.549 h1.83
  text "Hole Type" at -22.062,-44.549 h1.83
  text "Drill Layer Pair" at -12.543,-44.549 h1.83
  text "Via/Pad" at 5.809,-44.549 h1.83
  text "Pad Shape" at 13.502,-44.549 h1.83
  text "50" at -64.774,-47.699 h1.52
  text "0.300mm (11.81mil)" at -57.895,-47.699 h1.52
  text "-" at -42.896,-47.699 h1.52
  text "PTH" at -28.635,-47.699 h1.52
  text "Round" at -22.062,-47.699 h1.52
  text "Top Layer - Bottom Layer" at -12.543,-47.699 h1.52
  text "Via" at 5.809,-47.699 h1.52
  text "Rounded" at 13.502,-47.699 h1.52
  text "2" at -64.774,-50.85 h1.52
  text "0.600mm (23.62mil)" at -57.895,-50.85 h1.52
  text "1.600mm (62.99mil)" at -42.896,-50.85 h1.52
  text "PTH" at -28.635,-50.85 h1.52
  text "Slot" at -22.062,-50.85 h1.52
  text "Top Layer - Bottom Layer" at -12.543,-50.85 h1.52
  text "Pad" at 5.809,-50.85 h1.52
  text "Rounded" at 13.502,-50.85 h1.52
  text "2" at -64.774,-54 h1.52
  text "0.600mm (23.62mil)" at -57.895,-54 h1.52
  text "2.100mm (82.68mil)" at -42.896,-54 h1.52
  text "PTH" at -28.635,-54 h1.52
  text "Slot" at -22.062,-54 h1.52
  text "Top Layer - Bottom Layer" at -12.543,-54 h1.52
  text "Pad" at 5.809,-54 h1.52
  text "Rounded" at 13.502,-54 h1.52
  text "4" at -64.774,-57.15 h1.52
  text "1.100mm (43.31mil)" at -57.895,-57.15 h1.52
  text "-" at -42.896,-57.15 h1.52
  text "PTH" at -28.635,-57.15 h1.52
  text "Round" at -22.062,-57.15 h1.52
  text "Top Layer - Bottom Layer" at -12.543,-57.15 h1.52
  text "Pad" at 5.809,-57.15 h1.52
  text "(Mixed)" at 13.502,-57.15 h1.52
  text "2" at -64.774,-60.301 h1.52
  text "3.200mm (125.98mil)" at -57.895,-60.301 h1.52
  text "-" at -42.896,-60.301 h1.52
  text "NPTH" at -28.635,-60.301 h1.52
  text "Round" at -22.062,-60.301 h1.52
  text "Top Layer - Bottom Layer" at -12.543,-60.301 h1.52
  text "Pad" at 5.809,-60.301 h1.52
  text "Rounded" at 13.502,-60.301 h1.52
  text "60 Total" at -64.774,-63.451 h1.52
  text "Slot definitions :" at -72.398,-65.656 h1.52
  text "Routed Path Length" at -60.982,-65.656 h1.52
  text "= Calculated from tool start centre position to tool end centre position." at -47.308,-65.656 h1.52
  text "Hole Length" at -60.982,-66.916 h1.52
  text "= Routed Path Length + Tool Size = Slot length as defined in the PCB layout" at -52.37,-66.916 h1.52